# Allegro board VitaBoard.brd
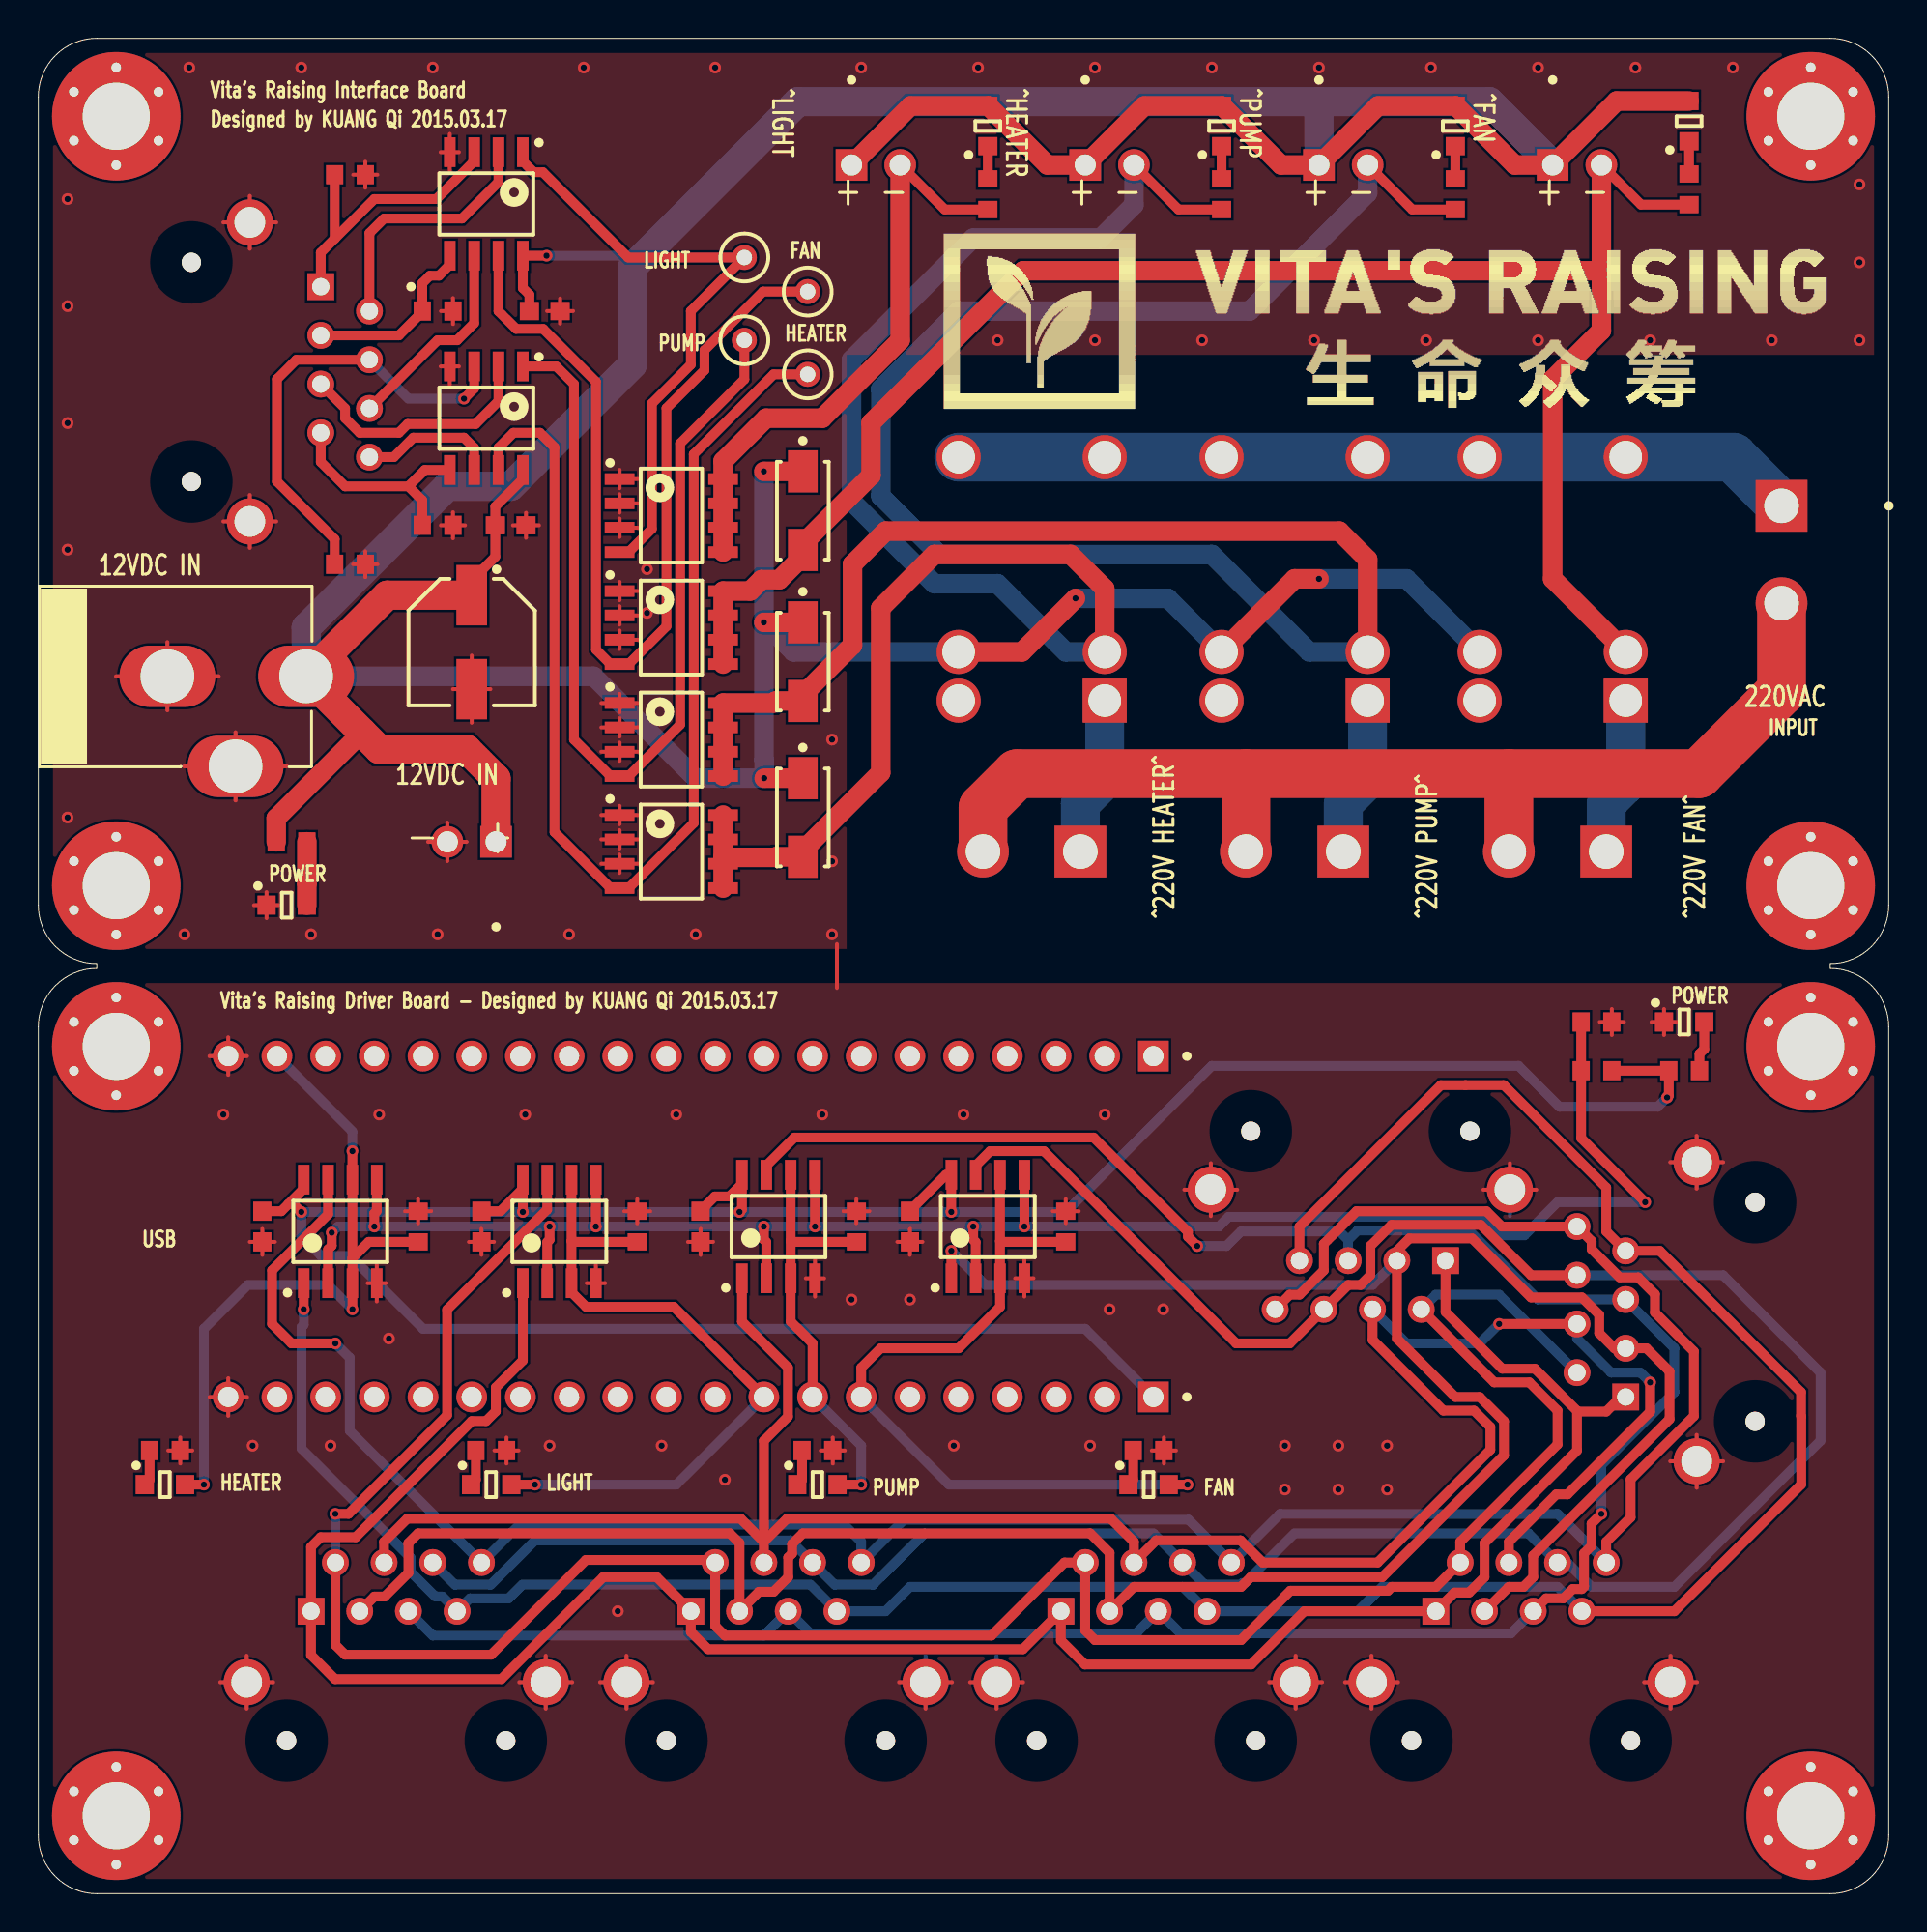
[diagram p0: board, top side]
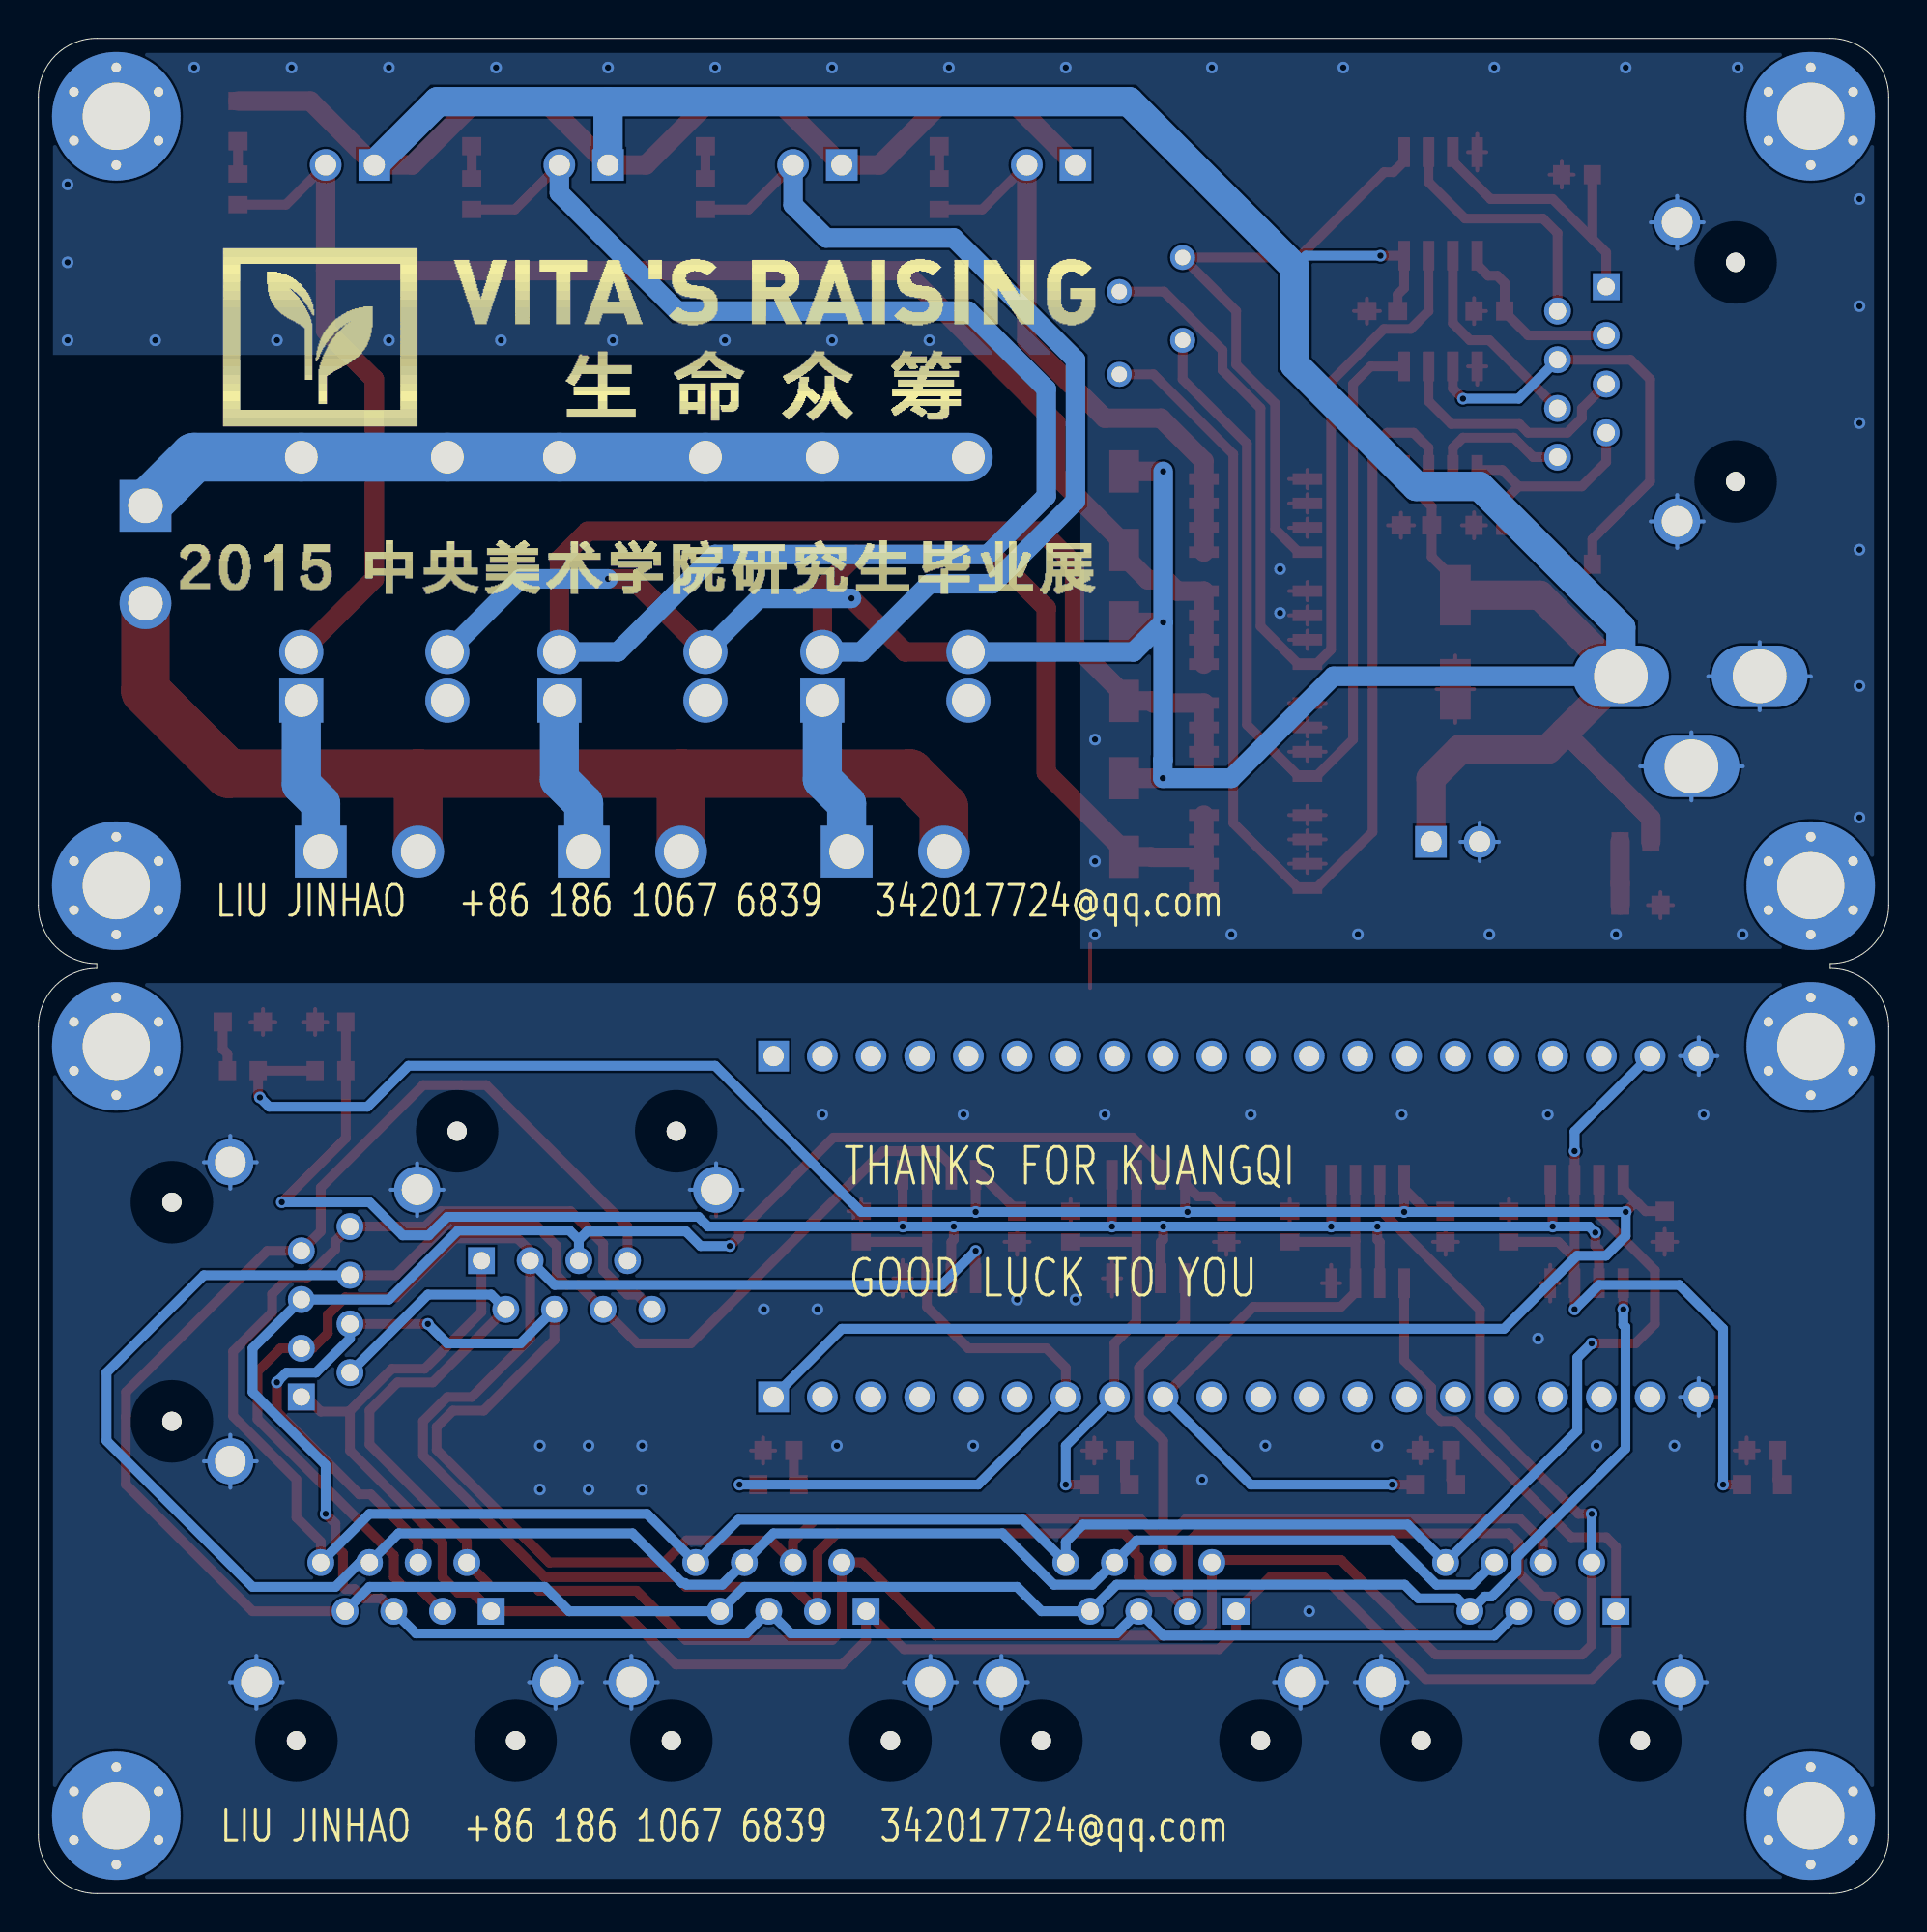
[diagram p1: board, bottom side, seen from below]

Outline 96.52 x 96.77 mm; copper layers: TOP, BOTTOM. Coordinates in mm from the lower left corner of the outline.
Outline path: 0,93.73 arc(0.89,95.88) 3.05,96.77 93.47,96.77 arc(95.63,95.88) 96.52,93.73 96.52,51.56 arc(95.63,49.41) 93.47,48.51 93.47,48.26 arc(95.63,47.37) 96.52,45.21 96.52,3.05 arc(95.63,0.89) 93.47,0 3.05,0 arc(0.89,0.89) 0,3.05 0,45.21 arc(0.89,47.37) 3.05,48.26 3.05,48.51 arc(0.89,49.41) 0,51.56 0,93.73

## Placement (name value [footprint] x y rotation side)
C1  100nF  [C0603]  11.68 34.8 270 top
C2  100nF  [C0603]  23.11 34.8 270 top
C3  100nF  [C0603]  34.54 34.8 270 top
C4  100nF  [C0603]  45.47 34.8 270 top
C5  100nF  [C0603]  26.42 82.55 0 top
C6  100nF  [C0603]  24.64 71.37 0 top
C7  47uF  [CAE63X54]  22.61 65.28 270 top
CON1  CON RJ45  [RJ45]  14.22 14.73 0 top
CON2  CON RJ45  [RJ45]  34.04 14.73 0 top
CON3  CON RJ45  [RJ45]  53.34 14.73 0 top
CON4  CON RJ45  [RJ45]  72.9 14.73 0 top
CON5  CON RJ45  [RJ45]  82.8 25.91 90 top
CON6  CON RJ45  [RJ45]  73.41 33.02 180 top
CON7  CON RJ45  [RJ45]  14.73 83.82 270 top
CON8  12V  [DC5521]  13.97 63.5 270 top
D1  LED  [LED0805]  23.62 21.34 0 top
D2  LED  [LED0805]  57.91 21.34 0 top
D3  LED  [LED0805]  40.64 21.34 0 top
D4  LED  [LED0805]  85.85 45.47 0 top
D5  LED  [LED0805]  6.6 21.34 0 top
D6  LED  [LED0805]  49.53 92.2 90 top
D7  LED  [LED0805]  86.11 92.46 90 top
D8  M7  [DO214AC]  39.88 72.14 270 top
D9  LED  [LED0805]  73.91 92.2 90 top
D10  M7  [DO214AC]  39.88 64.26 270 top
D11  LED  [LED0805]  61.72 92.2 90 top
D12  M7  [DO214AC]  39.88 56.13 270 top
D13  LED  [LED0805]  12.95 51.56 0 top
J1  HEADER_1X20  [HDR254_1X20]  58.17 43.69 180 top
J2  HEADER_1X20  [HDR254_1X20]  58.17 25.91 180 top
J3  LED_ARRAY  [HDR254_1X2R]  42.42 90.17 0 top
J4  220V_FAN  [PHNIX508]  81.79 54.36 180 top
J5  12V_FAN  [HDR254_1X2R]  78.99 90.17 0 top
J6  220V_PUMP  [PHNIX508]  68.07 54.36 180 top
J7  12V_PUMP  [HDR254_1X2R]  66.8 90.17 0 top
J8  220V_HEATER  [PHNIX508]  54.36 54.36 180 top
J9  220V  [PHNIX508]  90.93 72.39 270 top
J10  12V_HEATER  [HDR254_1X2R]  54.61 90.17 0 top
J11  12V  [HDR254_1X2R]  23.88 54.86 180 top
LS1  12V SPDT  [RELAY_SPDT_6P]  78.99 68.58 180 top
LS2  12V SPDT  [RELAY_SPDT_6P]  65.53 68.58 180 top
LS3  12V SPDT  [RELAY_SPDT_6P]  51.82 68.58 180 top
NOREF  -  [unnamed]  4.06 52.58 0 top
NOREF#2  -  [unnamed]  92.46 52.58 0 top
NOREF#3  -  [unnamed]  92.46 4.06 0 top
NOREF#4  -  [unnamed]  92.46 92.71 0 top
NOREF#5  -  [unnamed]  92.46 44.2 0 top
NOREF#6  -  [unnamed]  4.06 4.06 0 top
NOREF#7  -  [unnamed]  4.06 92.71 0 top
NOREF#8  -  [unnamed]  4.06 44.2 0 top
Q1  IRF7413 N-MOS  [SO8]  33.02 71.88 0 top
Q2  IRF7413 N-MOS  [SO8]  33.02 66.04 0 top
Q3  IRF7413 N-MOS  [SO8]  33.02 60.2 0 top
Q4  IRF7413 N-MOS  [SO8]  33.02 54.36 0 top
R1  1k  [R0603]  23.62 23.11 0 top
R2  10k  [R0603]  31.24 34.8 90 top
R3  10k  [R0603]  81.28 42.93 180 top
R4  1k  [R0603]  57.91 23.11 0 top
R5  10k  [R0603]  53.59 34.8 90 top
R6  4.7k  [R0603]  81.28 45.47 0 top
R7  1k  [R0603]  40.64 23.11 0 top
R8  10k  [R0603]  42.67 34.8 90 top
R9  1k  [R0603]  85.85 42.93 0 top
R10  1k  [R0603]  6.6 23.11 0 top
R11  10k  [R0603]  19.81 34.8 90 top
R12  4.7k  [R0603]  49.53 88.65 270 top
R13  100k  [R0603]  16.26 89.66 0 top
R14  4.7k  [R0603]  86.11 88.9 90 top
R15  100k  [R0603]  20.83 82.55 0 top
R16  4.7k  [R0603]  73.91 88.65 90 top
R17  100k  [R0603]  16.26 69.34 0 top
R18  4.7k  [R0603]  61.72 88.65 90 top
R19  100k  [R0603]  20.83 71.37 0 top
R20  4.7k  [R0603]  13.21 54.86 0 top
TP1  T POINT R  [TP060]  36.83 85.34 0 top
TP2  T POINT R  [TP060]  40.13 83.57 0 top
TP3  T POINT R  [TP060]  36.83 81.03 0 top
TP4  T POINT R  [TP060]  40.13 79.25 0 top
U1  LM393N  [SO8]  27.18 34.54 90 top
U2  LM393N  [SO8]  49.53 34.8 90 top
U3  LM393N  [SO8]  38.61 34.8 90 top
U4  LM393N  [SO8]  15.75 34.54 90 top
U5  LM393N  [SO8]  23.37 88.14 270 top
U6  LM393N  [SO8]  23.37 76.96 270 top

## Library data of the parts
C1-C6 = CAP NP
C7 = CAP
CON1-CON7 = CON RJ45
CON8 = DC SOCKET
D1-D7 D9 D11 D13 = LED
D8 D10 D12 = DIODE
J1 J2 = HEADER_1X20
J3-J11 = CON2
LS1-LS3 = RELAY SPDT
Q1-Q4 = IRF7413
R1-R20 = R
TP1-TP4 = T POINT R
U1-U6 = LM393N

## Footprints (pads in the part's own frame, mm; a bottom-side part is the same pattern mirrored in y, then rotated)
C0603
  rect 1x0.95 smd: 1(-0.8,0) 2(0.8,0)
CAE63X54
  rect 3.15x1.6 smd: 1(-2.45,0) 2(2.45,0)
DC5521
  oval 3.2x4.999 hole 2.799: 1(0,0) 2(0,-7.239) 3(4.699,-3.683)
DO214AC
  rect 2.2x1.55 smd: A(2.05,0) C(-2.05,0)
HDR254_1X2R
  rect 1.65x1.65 hole 1.1: 1(0,0)
  round 1.65 hole 1.1: 2(2.54,0)
HDR254_1X20
  rect 1.6x1.6 hole 1.05: 1(0,0)
  round 1.6 hole 1.05: 2(2.54,0) 3(5.08,0) 4(7.62,0) 5(10.16,0) 6(12.7,0) 7(15.24,0) 8(17.78,0) 9(20.32,0) 10(22.86,0) 11(25.4,0) 12(27.94,0) 13(30.48,0) 14(33.02,0) 15(35.56,0) 16(38.1,0) 17(40.64,0) 18(43.18,0) 19(45.72,0) 20(48.26,0)
LED0805
  rect 0.95x1 smd: 1(-1.05,0) 2(1.05,0)
PHNIX508
  rect 2.7x2.7 hole 1.8: 1(0,0)
  round 2.7 hole 1.8: 2(5.08,0)
R0603
  rect 0.9x1 smd: 1(-0.8,0) 2(0.8,0)
RELAY_SPDT_6P
  rect 2.3x2.3 hole 1.7: 1(-3.81,6.35)
  round 2.3 hole 1.7: 2(-3.81,3.81) 3(-3.81,-6.35) 4(3.81,-6.35) 5(3.81,3.81) 6(3.81,6.35)
RJ45
  round 1 hole 3.25 unplated: (-1.27,-6.75) (10.16,-6.75)
  rect 1.4x1.4 hole 0.9: 1(0,0)
  round 1.4 hole 0.9: 2(1.27,2.54) 3(2.54,0) 4(3.81,2.54) 5(5.08,0) 6(6.35,2.54) 7(7.62,0) 8(8.89,2.54)
  round 2.4 hole 1.6: M1(-3.355,-3.7) M2(12.245,-3.7)
SO8
  rect 1.55x0.6 smd: 1(-2.7,1.905) 2(-2.7,0.635) 3(-2.7,-0.635) 4(-2.7,-1.905) 5(2.7,-1.905) 6(2.7,-0.635) 7(2.7,0.635) 8(2.7,1.905)
TP060
  round 1.3 hole 0.8: 1(0,0)
unnamed
  round 1 hole 0.5: (-2.208,1.275) (-2.208,-1.275) (0,2.55) (0,-2.55) (2.208,1.275) (2.208,-1.275)
  round 6.7 hole 3.5: 1(0,0)

## Nets
GND: C1.2 C2.2 C3.2 C4.2 C5.2 C6.2 C7.2 CON1.M1(SHELL1) CON1.M2(SHELL2) CON2.M1(SHELL1) CON2.M2(SHELL2) CON3.M1(SHELL1) CON3.M2(SHELL2) CON4.M1(SHELL1) CON4.M2(SHELL2) CON5.M1(SHELL1) CON5.M2(SHELL2) CON6.M1(SHELL1) CON6.M2(SHELL2) CON7.M1(SHELL1) CON7.M2(SHELL2) CON8.2 CON8.3 D4.1(CATHODE) D13.1(CATHODE) J1.20 J2.20 J11.2 Q1.1(S1) Q1.2(S2) Q1.3(S3) Q2.1(S1) Q2.2(S2) Q2.3(S3) Q3.1(S1) Q3.2(S2) Q3.3(S3) Q4.1(S1) Q4.2(S2) Q4.3(S3) R1.2 R2.2 R4.2 R5.2 R6.2 R7.2 R8.2 R10.2 R11.2 R13.2 R15.2 R17.2 R19.2 U1.4(GND) U2.4(GND) U3.4(GND) U4.4(GND) U5.4(GND) U6.4(GND)
GND_EARTH: J4.2 J6.2 J8.2 J9.2
VCC_5V: C1.1 C2.1 C3.1 C4.1 J2.1 R3.1 R9.1 U1.8(V+) U2.8(V+) U3.8(V+) U4.8(V+)
VCC_12V: C5.1 C6.1 C7.1 CON8.1 D6.2(ANODE) D7.2(ANODE) D8.C D9.2(ANODE) D10.C D11.2(ANODE) D12.C J3.1 J5.1 J7.1 J10.1 J11.1 LS1.5(COIL1) LS2.5(COIL1) LS3.5(COIL1) R20.1 U5.8(V+) U6.8(V+)
VCC_220V: J9.1 LS1.3(COMMON1) LS1.4(COMMON2) LS2.3(COMMON1) LS2.4(COMMON2) LS3.3(COMMON1) LS3.4(COMMON2)
VCC_REF: R3.2 R6.1 U1.2(-IN) U1.5(+IN) U2.2(-IN) U2.5(+IN) U3.2(-IN) U3.5(+IN) U4.2(-IN) U4.5(+IN)
AIR: D2.2(ANODE) J2.7 R5.1 U2.3(+IN) U2.6(-IN)
B_AIR+: CON1.3(MDI1+) CON2.3(MDI1+) CON3.3(MDI1+) CON4.3(MDI1+) CON5.3(MDI1+) CON6.3(MDI1+) U2.1(OUT)
B_AIR-: CON1.6(MDI1-) CON2.6(MDI1-) CON3.6(MDI1-) CON4.6(MDI1-) CON5.6(MDI1-) CON6.6(MDI1-) U2.7(OUT)
B_HEATER+: CON1.7(MDI3+) CON2.7(MDI3+) CON3.7(MDI3+) CON4.7(MDI3+) CON5.7(MDI3+) CON6.7(MDI3+) U4.1(OUT)
B_HEATER-: CON1.8(MDI3-) CON2.8(MDI3-) CON3.8(MDI3-) CON4.8(MDI3-) CON5.8(MDI3-) CON6.8(MDI3-) U4.7(OUT)
B_LIGHT+: CON1.1(MDI0+) CON2.1(MDI0+) CON3.1(MDI0+) CON4.1(MDI0+) CON5.1(MDI0+) CON6.1(MDI0+) U1.1(OUT)
B_LIGHT-: CON1.2(MDI0-) CON2.2(MDI0-) CON3.2(MDI0-) CON4.2(MDI0-) CON5.2(MDI0-) CON6.2(MDI0-) U1.7(OUT)
B_WATER+: CON1.4(MDI2+) CON2.4(MDI2+) CON3.4(MDI2+) CON4.4(MDI2+) CON5.4(MDI2+) CON6.4(MDI2+) U3.1(OUT)
B_WATER-: CON1.5(MDI2-) CON2.5(MDI2-) CON3.5(MDI2-) CON4.5(MDI2-) CON5.5(MDI2-) CON6.5(MDI2-) U3.7(OUT)
D_AIR+: CON7.3(MDI1+) R15.1 U5.5(+IN)
D_AIR-: CON7.6(MDI1-) U5.6(-IN)
D_HEATER+: CON7.7(MDI3+) R19.1 U6.5(+IN)
D_HEATER-: CON7.8(MDI3-) U6.6(-IN)
D_LIGHT+: CON7.1(MDI0+) R13.1 U5.3(+IN)
D_LIGHT-: CON7.2(MDI0-) U5.2(-IN)
D_WATER+: CON7.4(MDI2+) R17.1 U6.3(+IN)
D_WATER-: CON7.5(MDI2-) U6.2(-IN)
HEATER: D5.2(ANODE) J1.19 R11.1 U4.3(+IN) U4.6(-IN)
LIGHT: D1.2(ANODE) J2.9 R2.1 U1.3(+IN) U1.6(-IN)
WATER: D3.2(ANODE) J2.8 R8.1 U3.3(+IN) U3.6(-IN)
N03668: Q1.4(G) TP1.1(TP) U5.1(OUT)
N04170: J3.2 Q1.5(D4) Q1.6(D3) Q1.7(D2) Q1.8(D1) R12.2
N05197: Q2.4(G) TP2.1(TP) U5.7(OUT)
N05245: D8.A J5.2 LS1.2(COIL2) Q2.5(D4) Q2.6(D3) Q2.7(D2) Q2.8(D1) R14.1
N07507: D7.1(CATHODE) R14.2
N08573: Q3.4(G) TP3.1(TP) U6.1(OUT)
N08625: D10.A J7.2 LS2.2(COIL2) Q3.5(D4) Q3.6(D3) Q3.7(D2) Q3.8(D1) R16.1
N08765: D9.1(CATHODE) R16.2
N10211: Q4.4(G) TP4.1(TP) U6.7(OUT)
N10263: D12.A J10.2 LS3.2(COIL2) Q4.5(D4) Q4.6(D3) Q4.7(D2) Q4.8(D1) R18.1
N10403: D11.1(CATHODE) R18.2
N11922: D6.1(CATHODE) R12.1
N27684: D4.2(ANODE) R9.2
N28316: D5.1(CATHODE) R10.1
N28436: D3.1(CATHODE) R7.1
N28551: D2.1(CATHODE) R4.1
N28667: D1.1(CATHODE) R1.1
N53579: J4.1 LS1.1(NO)
N53598: J6.1 LS2.1(NO)
N55241: J8.1 LS3.1(NO)
N68119: D13.2(ANODE) R20.2

Pads without a net: J1 1 2 3 4 5 6 7 8 9 10 11 12 13 14 15 16 17 18; J2 2 3 4 5 6 10 11 12 13 14 15 16 17 18 19; LS1 6; LS2 6; LS3 6; NOREF 1; NOREF#2 1; NOREF#3 1; NOREF#4 1; NOREF#5 1; NOREF#6 1; NOREF#7 1; NOREF#8 1

## Via types
v1: diameter 0.61, hole 0.33, TOP to BOTTOM, 102 vias

## Routing (per net, layer and track width the routed paths; a pad name or vN(x,y) marks a point on that pad's centre or on a via; arc(x,y) is an arc through that point)
GND: length 313.5
  TOP w0.203: 30.32,73.31 Q1.1 ; Q1.1 30.32,74.27 ; Q1.1 31.27,73.79 ; 8.93,43.69 J1.20 ; J1.20 10.88,43.69 ; J1.20 9.91,44.67 ; J1.20 9.91,42.71 ; 82.08,44.79 R6.2 ; R6.2 81.45,45.47 ; R6.2 82.71,45.47 ; R6.2 82.08,46.14 ; 19.81,34.97 R11.2 ; R11.2 20.49,35.6 ; R11.2 19.81,36.23 ; R11.2 19.13,35.6 ; Q4.2 30.32,55.47 ; Q4.2 31.27,54.99 ; Q4.2 30.32,54.51 ; Q4.2 29.37,54.99 ; 11.68,33.32 C1.2 ; C1.2 11.68,34.68 ; C1.2 12.34,34 ; C1.2 11.03,34 ; CON4.M2 86.52,11.03 ; CON4.M2 85.14,9.65 ; CON4.M2 85.14,12.41 ; CON4.M2 83.76,11.03 ; 6.73,61.72 CON8.2 ; CON8.2 9.41,63.5 ; CON8.2 6.73,65.28 ; CON8.2 4.05,63.5 ; 45.47,33.32 C4.2 ; C4.2 44.81,34 ; C4.2 46.12,34 ; C4.2 45.47,34.68 ; CON5.M1 87.88,22.55 ; CON5.M1 85.13,22.55 ; CON5.M1 86.5,23.93 ; CON5.M1 86.5,21.17 ; 30.32,67.47 30.32,67.94 ; 30.32,67.94 30.32,68.42 ; 30.32,67.94 31.27,67.94 ; 48.61,11.03 CON3.M1 ; CON3.M1 49.98,9.65 ; CON3.M1 51.36,11.03 ; 30.32,70.77 Q1.3 ; Q1.3 30.32,71.73 ; Q1.3 31.27,71.25 ; CON7.M1 11.03,88.55 ; CON7.M1 12.41,87.18 ; CON7.M1 11.03,85.8 ; CON7.M1 9.65,87.18 ; 41.44,22.44 R7.2 ; R7.2 42.07,23.11 ; R7.2 41.44,23.79 ; R7.2 40.81,23.11 ; C2.2 23.77,34 ; C2.2 23.11,33.32 ; C2.2 23.11,34.68 ; C2.2 22.46,34 ; R1.2 25.05,23.11 ; R1.2 24.42,23.79 ; R1.2 23.79,23.11 ; R1.2 24.42,22.44 ; Q3.1 31.27,62.1 ; Q3.1 30.32,62.58 ; Q3.1 30.32,61.62 ; Q3.1 29.37,62.1 ; 30.32,59.08 Q3.3 ; Q3.3 30.32,60.04 ; Q3.3 31.27,59.56 ; Q3.3 29.37,59.56 ; 58.71,22.44 R4.2 ; R4.2 58.08,23.11 ; R4.2 59.34,23.11 ; R4.2 58.71,23.79 ; CON5.M2 86.5,39.53 ; CON5.M2 87.88,38.15 ; CON5.M2 85.13,38.15 ; CON5.M2 86.5,36.77 ; 42.67,34.97 R8.2 ; R8.2 43.35,35.6 ; R8.2 41.99,35.6 ; R8.2 42.67,36.23 ; CON7.M2 12.41,71.57 ; CON7.M2 11.03,70.2 ; CON7.M2 11.03,72.95 ; CON7.M2 9.65,71.57 ; Q3.2 31.27,60.83 ; Q3.2 29.37,60.83 ; Q3.2 30.32,61.31 ; Q3.2 30.32,60.35 ; U1.4 29.56,31.84 ; U1.4 29.08,32.8 ; U1.4 28.6,31.84 ; 21.34,53.86 J11.2 ; J11.2 20.33,54.86 ; J11.2 22.34,54.86 ; J11.2 21.34,55.87 ; C7.2 23.58,62.83 ; C7.2 22.61,61.07 ; C7.2 21.63,62.83 ; C7.2 22.61,64.58 ; CON3.M2 65.59,12.41 ; CON3.M2 66.96,11.03 ; CON3.M2 64.21,11.03 ; CON3.M2 65.59,9.65 ; CON2.M1 30.68,12.41 ; CON2.M1 29.3,11.03 ; CON2.M1 30.68,9.65 ; CON2.M1 32.06,11.03 ; CON6.M2 61.16,38.1 ; CON6.M2 59.78,36.72 ; CON6.M2 62.54,36.72 ; CON6.M2 61.16,35.34 ; C3.2 34.54,34.68 ; C3.2 35.2,34 ; C3.2 33.89,34 ; C3.2 34.54,33.32 ; D13.1 12.56,51.56 ; D13.1 11.9,50.88 ; D13.1 11.9,52.24 ; D13.1 11.25,51.56 ; R10.2 7.4,23.79 ; R10.2 6.78,23.11 ; R10.2 7.4,22.44 ; R10.2 8.03,23.11 ; J2.20 9.91,26.89 ; J2.20 9.91,24.93 ; J2.20 8.93,25.91 ; J2.20 10.88,25.91 ; U4.4 18.13,31.84 ; U4.4 17.65,32.8 ; U4.4 17.17,31.84 ; U4.4 17.65,30.89 ; CON2.M2 47.66,11.03 ; CON2.M2 44.9,11.03 ; CON2.M2 46.28,9.65 ; Q4.3 31.27,53.72 ; Q4.3 30.32,53.24 ; Q4.3 30.32,54.2 ; Q4.3 29.37,53.72 ; CON6.M1 78.14,36.72 ; CON6.M1 76.76,38.1 ; CON6.M1 75.38,36.72 ; C6.2 25.44,72.03 ; C6.2 25.44,70.72 ; C6.2 26.12,71.37 ; C6.2 24.76,71.37 ; Q2.2 30.32,67.15 ; Q2.2 31.27,66.67 ; Q2.2 30.32,66.2 ; 26.54,82.55 C5.2 ; C5.2 27.22,81.9 ; C5.2 27.89,82.55 ; C5.2 27.22,83.2 ; D4.1 85.46,45.47 ; D4.1 84.8,44.79 ; D4.1 84.15,45.47 ; D4.1 84.8,46.14 ; 30.32,72.52 30.32,73 ; 30.32,72.52 30.32,72.04 ; 30.32,72.52 31.27,72.52 ; U3.4 40.51,33.05 ; U3.4 40.03,32.1 ; U3.4 40.51,31.14 ; U3.4 40.99,32.1 ; CON1.M2 27.85,11.03 ; CON1.M2 26.47,9.65 ; CON1.M2 26.47,12.41 ; CON1.M2 25.09,11.03 ; 68.16,11.03 CON4.M1 ; CON4.M1 69.54,12.41 ; CON4.M1 69.54,9.65 ; CON4.M1 70.92,11.03 ; 20.98,90.84 21.46,90.84 ; 21.46,90.84 21.46,89.88 ; 21.46,90.84 21.94,90.84 ; 21.46,90.84 21.46,91.79 ; U2.4 51.91,32.1 ; U2.4 50.96,32.1 ; U2.4 51.44,31.14 ; U2.4 51.44,33.05 ; Q4.1 30.32,56.74 ; Q4.1 31.27,56.26 ; Q4.1 29.37,56.26 ; Q4.1 30.32,55.78 ; 53.59,34.97 R5.2 ; R5.2 53.59,36.23 ; R5.2 52.92,35.6 ; R5.2 54.27,35.6 ; 21.63,70.7 R19.2 ; R19.2 21,71.37 ; R19.2 21.63,72.05 ; R19.2 22.26,71.37 ; R13.2 17.06,90.34 ; R13.2 17.68,89.66 ; R13.2 16.43,89.66 ; R13.2 17.06,88.98 ; 41.66,49.53 41.66,47.24 ; 30.56,35.6 R2.2 ; R2.2 31.24,36.23 ; R2.2 31.24,34.97 ; R2.2 31.92,35.6 ; 21,82.55 R15.2 ; R15.2 21.63,81.87 ; R15.2 21.63,83.23 ; Q2.3 31.27,65.41 ; Q2.3 30.32,64.93 ; Q2.3 30.32,65.88 ; 7.61,58.8 CON8.3 ; CON8.3 12.96,58.8 ; CON8.3 10.29,60.58 ; CON8.3 10.29,57.02 ; R17.2 17.68,69.34 ; R17.2 17.06,68.66 ; R17.2 16.43,69.34 ; R17.2 17.06,70.02 ; 20.98,79.66 21.46,79.66 ; 21.46,79.66 21.46,78.71 ; 21.46,79.66 21.94,79.66 ; 9.49,11.03 CON1.M1 ; CON1.M1 10.87,9.65 ; CON1.M1 10.87,12.41 ; CON1.M1 12.25,11.03
  BOTTOM w0.203: CON1.M2 27.85,11.03 ; CON1.M2 25.09,11.03 ; CON1.M2 26.47,9.65 ; CON1.M2 26.47,12.41 ; 11.03,85.8 CON7.M1 ; CON7.M1 11.03,88.55 ; CON7.M1 12.41,87.18 ; CON7.M1 9.65,87.18 ; 85.13,22.55 CON5.M1 ; CON5.M1 87.88,22.55 ; CON5.M1 86.5,23.93 ; CON5.M1 86.5,21.17 ; CON2.M2 46.28,12.41 ; CON2.M2 44.9,11.03 ; CON2.M2 46.28,9.65 ; CON2.M2 47.66,11.03 ; 85.13,38.15 CON5.M2 ; CON5.M2 87.88,38.15 ; CON5.M2 86.5,39.53 ; CON5.M2 86.5,36.77 ; J2.20 10.88,25.91 ; J2.20 9.91,26.89 ; J2.20 9.91,24.93 ; CON8.3 10.29,60.58 ; CON8.3 7.61,58.8 ; CON8.3 10.29,57.02 ; CON8.3 12.96,58.8 ; 8.93,43.69 J1.20 ; J1.20 9.91,42.71 ; J1.20 10.88,43.69 ; J1.20 9.91,44.67 ; CON1.M1 12.25,11.03 ; CON1.M1 10.87,9.65 ; CON1.M1 10.87,12.41 ; CON1.M1 9.49,11.03 ; 83.76,11.03 CON4.M2 ; CON4.M2 85.14,12.41 ; CON4.M2 86.52,11.03 ; CON4.M2 85.14,9.65 ; 29.3,11.03 CON2.M1 ; CON2.M1 30.68,12.41 ; CON2.M1 32.06,11.03 ; CON2.M1 30.68,9.65 ; CON7.M2 12.41,71.57 ; CON7.M2 11.03,72.95 ; CON7.M2 11.03,70.2 ; CON7.M2 9.65,71.57 ; J11.2 22.34,54.86 ; J11.2 20.33,54.86 ; J11.2 21.34,55.87 ; J11.2 21.34,53.86 ; CON3.M1 49.98,12.41 ; CON3.M1 48.61,11.03 ; CON3.M1 51.36,11.03 ; CON3.M1 49.98,9.65 ; CON3.M2 66.96,11.03 ; CON3.M2 64.21,11.03 ; CON3.M2 65.59,12.41 ; CON3.M2 65.59,9.65 ; CON4.M1 69.54,12.41 ; CON4.M1 69.54,9.65 ; CON4.M1 70.92,11.03 ; CON4.M1 68.16,11.03 ; CON6.M1 76.76,38.1 ; CON6.M1 78.14,36.72 ; CON6.M1 75.38,36.72 ; CON6.M1 76.76,35.34 ; 59.78,36.72 CON6.M2 ; CON6.M2 61.16,38.1 ; CON6.M2 62.54,36.72 ; CON8.2 6.73,65.28 ; CON8.2 9.41,63.5 ; CON8.2 6.73,61.72 ; CON8.2 4.05,63.5
  vias: v1(1.52,88.39) v1(1.52,82.8) v1(1.52,76.71) v1(1.52,70.1) v1(1.52,62.99) v1(1.52,56.13) v1(7.62,50.04) v1(7.87,95.25) v1(9.65,40.64) v1(11.18,23.37) v1(13.72,95.25) v1(14.22,50.04) v1(15.24,23.37) v1(17.78,40.64) v1(18.29,28.96) v1(20.57,95.25) v1(20.83,50.04) v1(25.4,40.64) v1(26.67,23.37) v1(27.69,50.04) v1(28.45,95.25) v1(30.23,14.73) v1(31.75,69.09) v1(31.75,66.8) v1(32.51,23.37) v1(33.27,40.64) v1(34.29,50.04) v1(35.31,95.25) v1(35.81,21.59) v1(40.89,40.64) v1(41.4,60.2) v1(41.4,53.85) v1(41.4,50.04) v1(42.42,30.99) v1(42.93,95.25) v1(45.47,30.99) v1(47.75,23.37) v1(48.26,40.64) v1(49.02,95.25) v1(50.04,81.03) v1(54.86,23.37) v1(55.12,95.25) v1(55.12,81.03) v1(55.63,40.64) v1(55.88,30.48) v1(58.67,30.48) v1(60.71,81.03) v1(61.21,95.25) v1(65.02,23.37) v1(65.02,21.08) v1(66.55,81.03) v1(66.8,95.25) v1(67.82,23.37) v1(67.82,21.08) v1(70.36,23.37) v1(70.36,21.08) v1(72.39,81.03) v1(72.64,95.25) v1(78.23,95.25) v1(78.23,81.03) v1(83.31,95.25) v1(84.07,81.03) v1(88.39,95.25) v1(90.42,81.03) v1(95,89.15) v1(95,85.09) v1(95,81.03)
GND_EARTH: length 59.2
  TOP w2.54: J8.2 49.28,56.64 51.05,58.42 62.99,58.42 ; J9.2 90.93,62.74 86.61,58.42 76.71,58.42 ; J4.2 76.71,58.42 ; 76.71,58.42 62.99,58.42 ; J6.2 62.99,58.42
VCC_5V: length 147
  TOP w0.508: 25.27,36.77 v1(25.27,35.56) ; 25.27,36.77 24.1,35.6 C2.1 ; 25.27,36.77 U1.8 ; C1.1 12.67,35.6 13.05,35.97 ; 36.7,37.02 36.05,36.37 35.29,36.37 34.54,35.62 C3.1 ; 36.7,37.02 36.7,35.69 v1(36.58,35.56) ; 36.7,37.02 36.7,37.5 ; 13.05,35.97 13.84,36.77 U4.8 ; 13.05,35.97 13.3,35.97 v1(13.72,35.56) ; C4.1 45.47,35.62 47.34,37.5 U2.8 v1(47.62,35.56) ; R3.1 R9.1 85.05,41.62 v1(84.96,41.53)
  BOTTOM w0.508: J2.1 54.61,29.46 20.07,29.46 16.26,33.27 14.74,33.27 13.72,34.3 v1(13.72,35.56) v1(25.27,35.56) v1(36.58,35.56) v1(47.62,35.56) 53.59,35.56 61.21,43.18 77.22,43.18 79.35,41.04 84.48,41.04 v1(84.96,41.53)
VCC_12V: length 280.9
  TOP w0.508: v1(26.51,85.44) U5.8 25.27,83.75 25.62,83.41 C5.1 ; U6.8 25.27,73.79 23.84,72.35 C6.1 23.84,69.73 22.61,68.5 C7.1
  TOP w1.016: D7.2 82.33,93.51 J5.1 77.02,90.17 73.94,93.25 D9.2 69.88,93.25 J7.1 64.83,90.17 61.75,93.25 D11.2 57.69,93.25 J10.1 52.64,90.17 49.56,93.25 D6.2 45.5,93.25 J3.1 ; D10.C v1(37.85,66.31) ; D12.C v1(37.86,58.18) ; 16.89,60.58 12.41,56.09 R20.1 ; v1(54.1,67.56) 51.31,64.77 LS3.5 ; LS2.5 65.53,68.58 v1(66.8,68.58) ; D8.C v1(37.85,74.19)
  TOP w1.524: J11.1 23.88,58.17 22.35,59.69 17.78,59.69 CON8.1 18.2,67.73 C7.1
  BOTTOM w0.508: 30.99,84.84 30.39,85.44 v1(26.51,85.44)
  BOTTOM w1.016: v1(54.1,67.56) 58.93,67.56 LS2.5 ; v1(37.85,66.31) 37.85,59.14 37.86,59.12 v1(37.86,58.18) 34.28,58.18 28.97,63.5 CON8.1 ; v1(37.85,66.31) 39.39,64.77 LS3.5 ; v1(37.85,66.31) v1(37.85,74.19) ; LS1.5 71.37,68.58 v1(66.8,68.58)
  BOTTOM w1.524: CON8.1 13.97,66.04 21.34,73.41 24.64,73.41 30.99,79.76 30.99,84.84 39.62,93.47 66.8,93.47 ; 66.8,93.47 75.69,93.47 J5.1 ; 66.8,93.47 J7.1
VCC_220V: length 44
  BOTTOM w2.54: LS3.4 LS3.3 LS2.4 LS2.3 LS1.4 LS1.3 88.39,74.93 J9.1
VCC_REF: length 102.3
  TOP w0.508: v1(37.85,34.8) 37.85,34.11 37.97,33.99 U3.2 ; v1(26.67,34.8) 26.67,34.11 26.54,33.99 U1.2 ; U2.2 48.9,33.99 48.77,34.11 v1(48.77,34.8) ; U2.5 v1(51.44,34.8) ; v1(15.3,34.48) 15.3,33.79 15.11,33.6 U4.2 ; U1.5 v1(29.08,34.8) ; v1(83.82,36.07) 80.48,39.41 R3.2 R6.1 ; v1(17.53,34.8) 17.53,35.48 17.65,35.61 U4.5 ; U3.5 v1(40.51,34.8)
  BOTTOM w0.508: v1(83.82,36.07) 79.25,36.07 77.52,34.34 76.15,34.34 75.18,35.31 62.09,35.31 61.58,34.8 v1(51.44,34.8) v1(48.77,34.8) v1(40.51,34.8) v1(37.85,34.8) v1(29.08,34.8) v1(26.67,34.8) v1(17.53,34.8) 15.62,34.8 v1(15.3,34.48)
AIR: length 40.3
  TOP w0.508: R5.1 50.2,34 50.16,34.04 ; U2.6 50.16,34.04 ; 50.16,34.04 U2.3 50.16,30.61 48.01,28.45 43.94,28.45 42.93,27.43 J2.7 ; D2.2 v1(59.94,21.34)
  BOTTOM w0.508: v1(59.94,21.34) 47.5,21.34 J2.7
B_AIR+: length 150
  TOP w0.508: CON4.3 76.71,16 77.47,16 77.98,16.51 77.98,17.64 85.09,24.75 85.09,27.24 83.89,28.45 CON5.3 82.21,28.45 81.42,29.24 81.42,30.2 80.52,31.1 77.87,31.1 74.79,34.18 71.52,34.18 70.87,33.53 CON6.3 70.87,28.96 73.91,25.91 75.18,25.91 76.45,24.64 76.45,22.86 70.1,16.51 63.25,16.51 62.74,16 57.15,16 CON3.3 55.88,17.78 54.86,18.8 39.88,18.8 39.32,18.24 39.32,17.74 39.12,17.54 39.12,16.51 38.35,15.75 37.59,15.75 CON2.3 36.58,18.29 36.07,18.8 19.81,18.8 19.3,18.29 19.3,16.74 18.06,15.5 17.53,15.5 CON1.3 ; U2.1 v1(47.62,33.53)
  BOTTOM w0.508: CON6.3 69.6,31.75 49.4,31.75 v1(47.62,33.53)
B_AIR-: length 141.6
  TOP w0.508: CON5.6 77.87,32.26 75.24,34.89 70.59,34.89 69.48,33.78 69.48,32.26 68.98,31.75 68.33,31.75 CON6.6 65.28,28.7 62.48,28.7 52.46,38.73 49.65,38.73 48.9,37.97 U2.7
  BOTTOM w0.508: CON5.6 87.88,32.26 92.96,27.18 92.96,23.62 85.34,16 81.03,16 79.76,17.27 CON4.6 77.72,18.8 65.53,18.8 62.94,16.21 62.8,16.21 62.71,16.11 60.85,16.11 CON3.6 58.17,18.8 46.23,18.8 43.55,16.11 41.54,16.11 CON2.6 39.23,18.43 25.91,18.43 23.59,16.11 21.73,16.11 CON1.6
B_HEATER+: length 140.6
  TOP w0.508: CON6.7 65.79,34.8 73.16,42.17 74.44,42.17 74.44,42.17 76.44,42.17 81.79,36.83 81.79,34.54 CON5.7 84.58,33.53 91.95,26.16 91.95,24.93 91.96,24.87 91.96,21.35 85.34,14.73 CON4.7 ; U4.1 v1(13.84,30.48)
  BOTTOM w0.508: v1(13.84,30.48) 13.84,29.67 13.73,29.55 13.73,23.21 19.42,17.53 19.42,16.79 20.71,15.5 21.08,15.5 CON1.7 22.52,15.4 24.54,15.4 25.25,16.11 40.27,16.11 CON2.7 44.2,14.73 45.47,16 59.69,16 CON3.7 68.83,14.73 70.1,16 79.25,16 CON4.7
B_HEATER-: length 133.5
  TOP w0.508: v1(15.49,28.7) 13.21,28.7 12.19,29.72 12.19,32.51 15.11,35.43 U4.7 ; CON4.8 81.79,18.35 83.06,19.62 83.06,21.61 86.36,24.91 86.36,28.28 84.33,30.31 84.33,31.27 83.45,32.15 82.49,32.15 81.03,33.61 81.03,34.03 CON5.8 76.34,34.8 75.54,35.6 68.76,35.6 67.06,33.89 67.06,32.51 65.79,31.24 65.28,31.24 CON6.8
  BOTTOM w0.508: v1(15.49,28.7) 16.24,27.95 16.24,24.14 CON1.8 25.1,19.25 42.03,19.25 42.93,18.35 CON2.8 45.16,19.51 59.99,19.51 CON3.8 64.77,19.81 79.25,19.81 CON4.8
B_LIGHT+: length 121.6
  TOP w0.508: U1.1 25.27,27.81 23.86,26.4 23.86,25.16 23.36,24.65 22.61,24.65 16.55,18.59 14.73,18.59 14.22,18.08 CON1.1 14.22,12.45 15.48,11.19 24.15,11.19 29.46,16.51 32.26,16.51 CON2.1 34.04,13.65 34.94,12.75 51.36,12.75 CON3.1 53.34,13.21 54.59,11.96 63.26,11.96 66.04,14.73 CON4.1 73.87,15.7 74.63,15.7 75.44,16.51 75.44,18.29 80.26,23.11 80.26,25.19 ; CON5.1 82.55,25.91 81.79,25.15 80.3,25.15 80.26,25.19 ; CON6.1 73.41,30.34 76.36,27.38 78.07,27.38 80.26,25.19
B_LIGHT-: length 130.2
  TOP w0.508: CON6.2 75.95,26.67 77.77,26.67 79.25,25.2 79.25,23.43 74.17,18.35 CON4.2 72.9,16 70.6,16 70.4,15.8 65.31,15.8 62.74,13.23 55.12,13.23 54.61,13.73 CON3.2 53.53,17.27 49.72,13.46 35.81,13.46 35.31,13.97 CON2.2 35.17,17.41 28.57,17.41 23.62,12.46 16,12.46 15.49,12.97 CON1.2 ; v1(15.49,19.81) 16.18,19.81 21.32,24.96 21.32,30.47 26.54,35.69 U1.7
  BOTTOM w0.508: CON6.2 72.9,31.24 76.2,31.24 CON5.2 ; v1(15.49,19.81) CON1.2
B_WATER+: length 122.6
  TOP w0.508: CON5.4 v1(76.2,29.72) ; 37.85,18.35 37.85,23.62 39.1,24.88 39.1,27.44 36.7,29.84 36.7,32.1 ; 37.85,18.35 36.64,19.56 19.24,19.56 18.03,18.35 CON1.4 ; 37.85,18.35 CON2.4 ; 37.85,18.35 39.05,19.56 55.95,19.56 57.15,18.35 CON3.4 58.31,18.43 62.71,18.43 63.87,17.27 69.86,17.27 75.74,23.15 75.74,24.34 74.89,25.2 73.29,25.2 69.6,28.89 CON6.4 ; CON4.4 76.71,18.35 79.18,20.83 79.77,20.83 84.07,25.13 v1(84.07,26.67)
  BOTTOM w0.508: v1(84.07,26.67) 83.96,26.78 83.96,26.8 83.58,27.18 82.04,27.18 80.26,28.96 CON5.4 ; CON6.4 71.37,28.7 75.18,28.7 v1(76.2,29.72)
B_WATER-: length 134.5
  TOP w0.508: U3.7 37.97,37.97 39.44,39.44 55.05,39.44 59.97,34.52 59.97,34.27 v1(60.45,33.78) ; CON4.5 78.65,15.4 79.55,15.4 80.04,15.89 80.51,15.89 80.63,16.01 80.63,17.75 81.02,18.14 81.02,19.3 v1(81.53,19.81)
  BOTTOM w0.508: 68.33,34.1 68.82,34.59 74.63,34.59 78.23,30.99 CON5.5 85.34,28.45 85.34,26.16 81.53,22.35 v1(81.53,19.81) ; 68.33,34.1 67.88,34.54 62.74,34.54 61.98,33.78 v1(60.45,33.78) ; 68.33,34.1 CON6.5 ; CON4.5 76.82,13.57 59.58,13.57 CON3.5 57.26,13.57 40.27,13.57 CON2.5 37.85,13.46 20.57,13.46 CON1.5
D_AIR+: length 9.6
  TOP w0.508: 21.46,85.44 21.46,84.96 20.89,84.39 20.42,84.39 20.03,84 R15.1 20.03,82.5 18.81,81.28 CON7.3
D_AIR-: length 10.8
  TOP w0.508: CON7.6 20.83,81.03 21.84,81.03 22.73,81.92 U5.6
D_HEATER+: length 11.5
  TOP w0.508: CON7.7 14.73,74.68 16,73.41 19.3,73.41 ; 19.3,73.41 20.16,74.26 21.46,74.26 ; 19.3,73.41 20.03,72.68 R19.1
D_HEATER-: length 7.3
  TOP w0.508: CON7.8 18.54,74.93 19.56,75.95 22.2,75.95 22.73,75.42 U6.6
D_LIGHT+: length 15.6
  TOP w0.508: U5.3 22.73,90.36 20.76,88.39 17.53,88.39 15.46,86.32 ; 15.46,86.32 14.73,85.6 CON7.1 ; 15.46,86.32 R13.1
D_LIGHT-: length 13.5
  TOP w0.508: CON7.2 17.27,86.61 18.03,87.38 22.1,87.38 24,89.28 U5.2
D_WATER+: length 23.8
  TOP w0.508: CON7.4 13.46,80.01 12.45,78.99 12.45,73.66 15.46,70.65 R17.1 ; v1(22.2,77.98) 22.73,78.51 U6.3
  BOTTOM w0.508: v1(22.2,77.98) 19.3,77.98 CON7.4
D_WATER-: length 13.1
  TOP w0.508: U6.2 24,77.85 22.81,76.66 19.26,76.66 18.81,76.2 16.76,76.2 16,76.96 16,77.47 CON7.5
HEATER: length 37
  TOP w0.508: v1(16.38,30.48) U4.3 16.38,33.15 ; R11.1 17.23,34 16.38,33.15 ; v1(16.38,38.73) U4.6 16.38,33.15 ; D5.2 v1(8.64,21.34)
  BOTTOM w0.508: v1(16.38,30.48) 15.11,31.75 10.92,31.75 8.64,29.46 v1(8.64,21.34) ; J1.19 16.38,39.75 v1(16.38,38.73)
LIGHT: length 36.7
  TOP w0.508: 27.81,37.24 27.81,34.04 ; 27.81,34.04 27.81,31.37 28.57,30.61 33.14,30.61 J2.9 ; 27.81,34.04 27.85,34 R2.1 ; D1.2 v1(25.91,21.34)
  BOTTOM w0.508: v1(25.91,21.34) 33.27,21.34 J2.9
WATER: length 22.4
  TOP w0.508: R8.1 39.28,34 39.24,34.04 ; J2.8 40.39,28.7 39.24,29.84 39.24,34.04 ; 39.24,34.04 39.24,37.5 ; D3.2 v1(42.93,21.34)
  BOTTOM w0.508: v1(42.93,21.34) 42.93,23.37 J2.8
N03668: length 32.5
  TOP w0.508: Q1.4 30.79,69.98 32,71.19 32,77.72 34.04,79.76 34.04,82.55 TP1.1 30.77,85.34 26.32,89.79 25.84,89.79 25.27,90.36 U5.1
N04170: length 31.3
  TOP w0.508: J3.2 47.28,87.85 R12.2
  TOP w1.016: J3.2 44.96,81.03 40.89,76.96 37.96,76.96 35.72,74.72 Q1.8 Q1.6 Q1.5
N05197: length 50.2
  TOP w0.508: TP2.1 37.8,83.57 34.75,80.51 34.75,79.46 32.77,77.48 32.77,66.11 30.79,64.14 Q2.4 29.84,64.14 29.09,64.89 29.09,78.86 26.33,81.62 24.93,81.62 24,82.54 U5.7
N05245: length 92
  TOP w0.508: R14.1 83.6,88.1 J5.2
  TOP w1.016: 81.53,84.65 J5.2 ; 81.53,84.65 81.53,81.53 78.99,78.99 78.99,68.58 LS1.2 ; 81.53,84.65 51.38,84.65 43.43,76.71 43.43,73.97 39.88,70.41 D8.A 39.88,69.76 38.65,68.54 37.72,68.54 37.13,67.94 35.72,67.94 Q2.7 Q2.6 Q2.5
N07507: length 1.7
  TOP w0.508: D7.1 R14.2
N08573: length 50.5
  TOP w0.508: U6.1 27.02,79.66 27.94,78.74 27.94,60.2 29.84,58.29 Q3.4 30.79,58.29 33.48,60.98 33.48,75.64 36.83,78.99 TP3.1
N08625: length 120.2
  TOP w0.508: J7.2 71.67,87.85 R16.1
  TOP w1.016: Q3.5 Q3.6 Q3.7 Q3.8 38.36,62.1 38.47,62.21 D10.A 39.88,62.54 42.47,65.13 42.47,69.34 44.2,71.07 67.87,71.07 69.34,69.6 LS2.2
  BOTTOM w1.016: LS2.2 66.29,64.77 61.21,69.85 46.99,69.85 43.94,72.9 43.94,78.49 48.01,82.55 63.18,82.55 69.34,88.71 J7.2
N08765: length 1.7
  TOP w0.508: D9.1 R16.2
N10211: length 61.6
  TOP w0.508: U6.7 24,75.42 24.79,76.2 26.16,76.2 26.92,75.44 26.92,55.37 29.84,52.45 Q4.4 30.79,52.45 34.19,55.84 34.19,75.08 38.35,79.25 TP4.1
N10263: length 89
  TOP w0.508: J10.2 59.47,87.85 R18.1
  TOP w1.016: Q4.8 Q4.7 35.72,54.06 ; 35.72,54.06 Q4.6 Q4.5 ; 35.72,54.06 38.44,54.06 38.47,54.08 D12.A 39.88,54.41 43.94,58.47 43.94,67.06 46.74,69.85 53.85,69.85 55.63,68.07 LS3.2
  BOTTOM w1.016: LS3.2 53.59,64.77 50.04,68.33 46.74,68.33 42.42,72.64 42.42,80.01 48.77,86.36 55.43,86.36 57.15,88.08 J10.2
N10403: length 1.7
  TOP w0.508: D11.1 R18.2
N11922: length 1.7
  TOP w0.508: D6.1 R12.1
N27684: length 2.6
  TOP w0.508: R9.2 86.65,43.81 86.9,44.06 D4.2
N28316: length 1.9
  TOP w0.508: D5.1 5.8,21.59 R10.1
N28436: length 1.9
  TOP w0.508: R7.1 39.84,21.59 D3.1
N28551: length 1.9
  TOP w0.508: D2.1 57.11,21.59 R4.1
N28667: length 1.9
  TOP w0.508: D1.1 22.82,21.59 R1.1
N53579: length 8.3
  BOTTOM w2.032: LS1.1 82.8,57.87 81.79,56.85 J4.1
N53598: length 8.4
  BOTTOM w2.032: LS2.1 69.34,58.12 68.07,56.85 J6.1
N55241: length 8.4
  BOTTOM w2.032: LS3.1 55.63,58.12 54.36,56.85 J8.1
N68119: length 3.3
  TOP w1.016: D13.2 14,52.7 14.01,52.7 R20.2

## Copper pours and planes (outline as drawn; the poured copper is in the pictures)
GND on TOP: 3.05,49.28 1.43,49.95 0.76,51.56 0.76,93.73 1.43,95.34 3.05,96.01 93.47,96.01 95.09,95.34 95.76,93.73 95.76,80.26 42.16,80.26 42.16,49.28 ; 3 cut-outs
GND on TOP: 95.76,3.05 95.09,1.43 93.47,0.76 3.05,0.76 1.43,1.43 0.76,3.05 0.76,45.21 1.43,46.83 3.05,47.5 93.47,47.5 95.09,46.83 95.76,45.21 ; 31 cut-outs
GND on BOTTOM: 3.05,49.28 1.43,49.95 0.76,51.56 0.76,93.73 1.43,95.34 3.05,96.01 93.47,96.01 95.09,95.34 95.76,93.73 95.76,80.26 42.16,80.26 42.16,49.28
GND on BOTTOM: 95.76,3.05 95.09,1.43 93.47,0.76 3.05,0.76 1.43,1.43 0.76,3.05 0.76,45.21 1.43,46.83 3.05,47.5 93.47,47.5 95.09,46.83 95.76,45.21 ; 20 cut-outs

## Text on the board
Ref Des/Silkscreen Bottom: LIU JINHAO   +86 186 1067 6839   342017724@qq.com | GOOD LUCK TO YOU | THANKS FOR KUANGQI
Ref Des/Silkscreen Top: USB | Vita's Raising Interface Board | Designed by KUANG Qi 2015.03.17 | Vita's Raising Driver Board - Designed by KUANG Qi 2015.03.17 | HEATER | POWER | LIGHT | PUMP | FAN | INPUT | 12VDC IN | 220VAC | ^220V HEATER^ | ^220V PUMP^ | ^220V FAN^ | ^LIGHT | ^HEATER | ^PUMP | ^FAN | + - | -  +
DISPLAY_TOP: FIGURE | SIZE | 13.0 | 19.69 | 31.5 | 35.43 | 41.34 | 43.31 | 62.99 | 66.93 | 70.87 | 110.2 | 137.8 | 127.95 | DRILL CHART: TOP to BOTTOM | ALL UNITS ARE IN MILS | PLATED | NON-PLATED | QTY | 102 | 48 | 4 | 49 | 7 | 40 | 5 | 14 | 3 | 15 | 8
